# EAGLE board head_band (EAGLE 8.6.0)
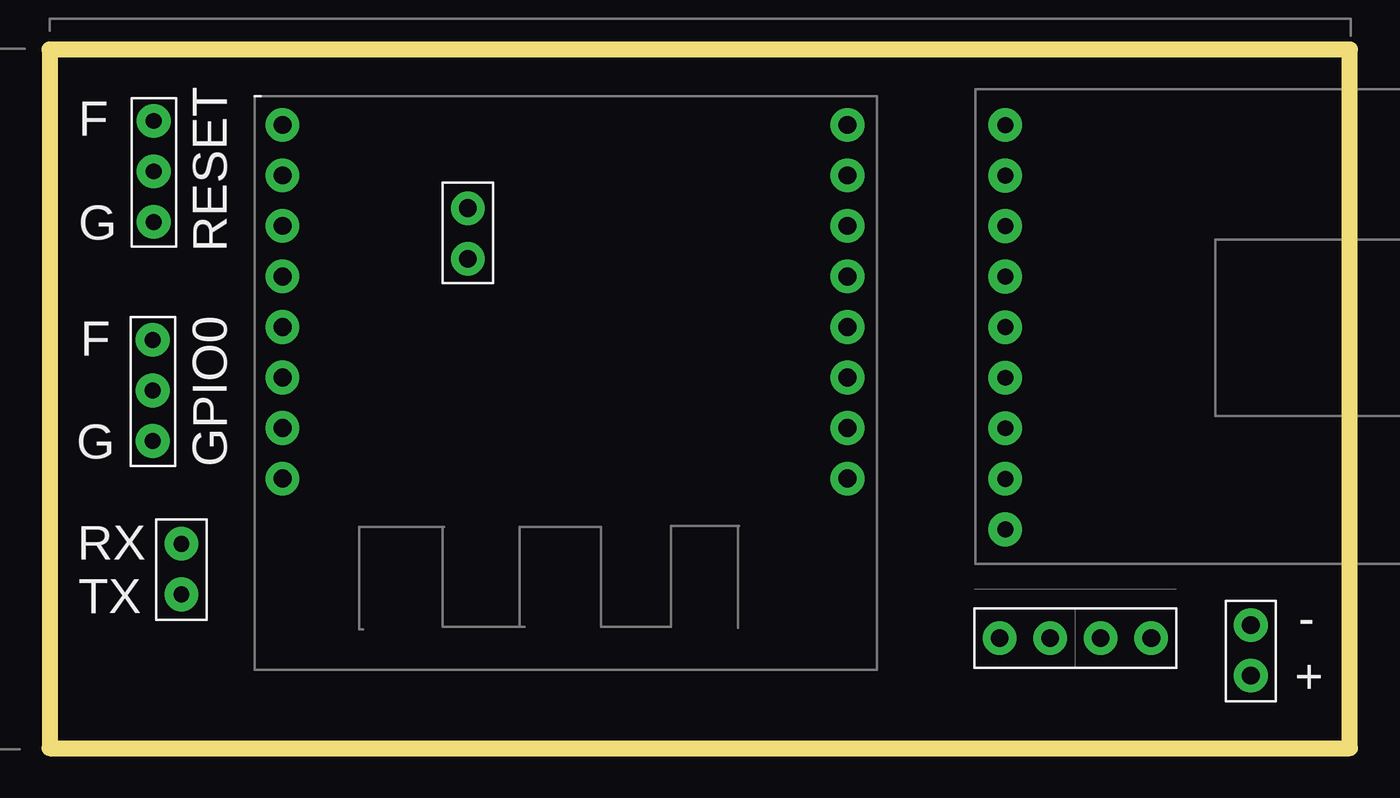
[diagram p0: board, top side]
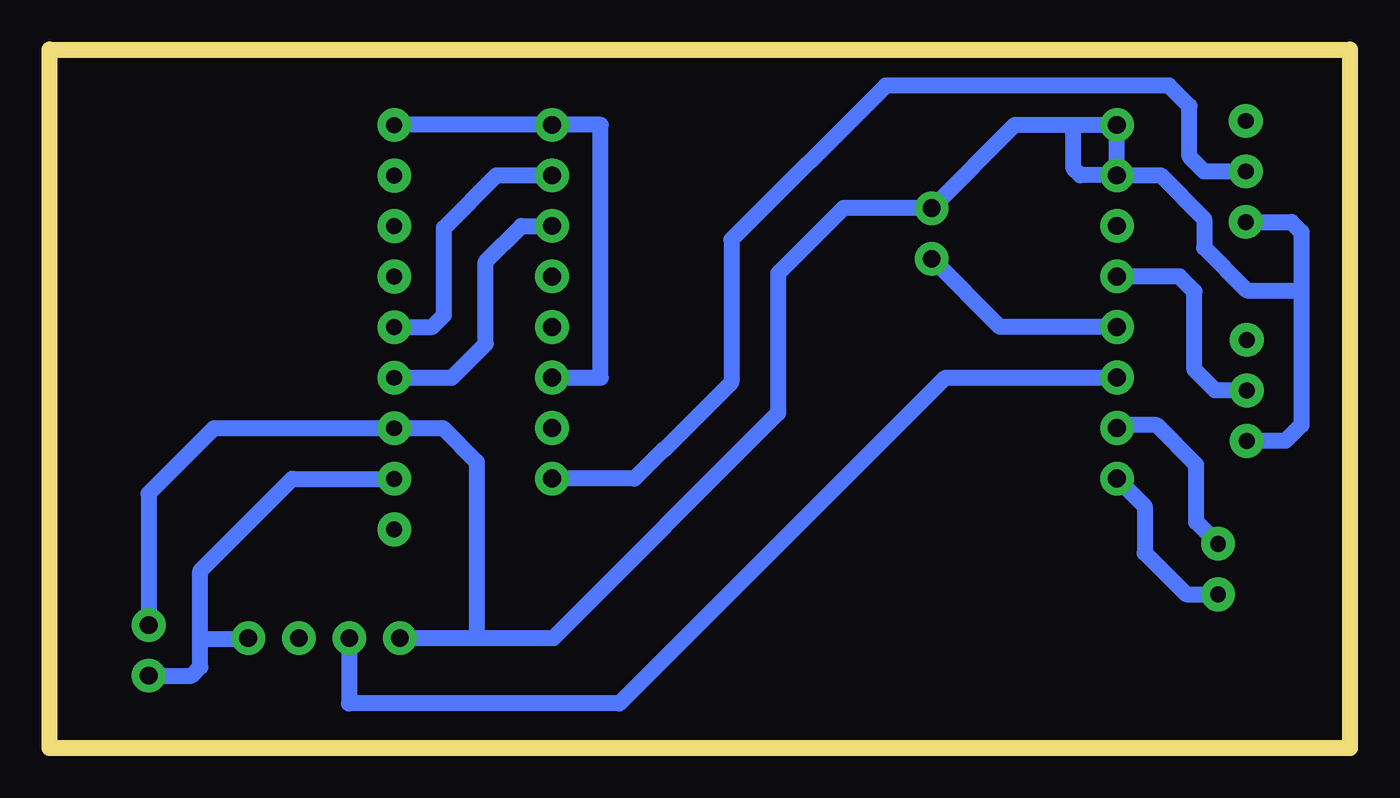
[diagram p1: board, bottom side, seen from below]

Size 65.6 x 35.25 mm. Coordinates in mm from the lower left corner, seen from the top.
Outline: 0,35.25 0,0 65.6,0 65.6,35.25 0,35.25
Copper layers (1*16): Top 0.035mm / dielectric 1.5mm / Bottom 0.035mm
Design rules "default": minimum track width 6mil, minimum drill 0.35mm, track to track 6mil, track to pad 6mil, pad to pad 6mil, via to via 6mil, smd to smd 6mil, copper to edge 40mil, drill to drill 6mil, minimum pad ring 10mil, minimum via ring 8mil, stop-mask expansion 4mil, vias tented up to drill 0mil, thermal gap 10mil

## Footprints (pad centres in the part's own frame; a part is rotated, then mirrored left to right if it is on the bottom)
ESP_WIFI_ME = drill 0.9 pad 1.7: P$1 -14.25,-11.35; P$2 -14.25,-8.8; P$3 -14.25,-6.25; P$4 -14.25,-3.7; P$5 -14.25,-1.15; P$6 -14.25,1.4; P$7 -14.25,3.95; P$8 -14.25,6.5; P$9 14.25,-11.35; P$10 14.25,-8.8; P$11 14.25,-6.25; P$12 14.25,-3.7; P$13 14.25,-1.15; P$14 14.25,1.4; P$15 14.25,3.95; P$16 14.25,6.5
GPS = drill 0.8 pad 1.7: P$1 -10.21,15.54; P$2 -7.66,15.54; P$3 -5.11,15.54; P$4 -2.56,15.54; P$5 -0.01,15.54; P$6 2.54,15.54; P$7 5.09,15.54; P$8 7.64,15.54; P$9 10.19,15.54
PIN_HEADER_2X1_GP = drill 0.9 pad 1.7: P$1 -1.31,0; P$2 1.24,0
PIN_HEADER_4X1_GP = drill 0.9 pad 1.7: P$1 -3.825,0; P$2 -1.275,0; P$3 1.275,0; P$4 3.825,0
PIN_HEADER_2X1_GP' = drill 0.8 pad 1.7: P$1 -1.31,0; P$2 1.24,0
PIN_HEADER_3X1_GP = drill 0.8 pad 1.7: P$1 0,0; P$2 2.55,0; P$3 -2.55,0

## Placement (x,y rotation side)
E$1  [ESP_WIFI_ME]  26,20.1 180 top
E$2  [GPS]  63.75,21.25 90 top
E$3  [PIN_HEADER_2X1_GP]  21.1,26 90 top
E$4  [PIN_HEADER_2X1_GP]  60.6,4.9 270 top
E$5  [PIN_HEADER_4X1_GP]  51.75,5.55 0 top
E$6  [PIN_HEADER_2X1_GP']  6.65,9 270 top
E$7  [PIN_HEADER_3X1_GP]  5.2,18.05 90 top
E$8  [PIN_HEADER_3X1_GP]  5.25,29.1 90 top

## Library data of the parts
E$1 = wifi
E$2 = GPS
E$3-E$5 = Pin_header
E$6-E$8 = custom components

## Nets
S$1: E$1.P$14
S$2: E$1.P$9 E$1.P$10 E$7.P$3 E$8.P$3
S$3: E$1.P$1 E$1.P$6
S$4: E$2.P$3 E$4.P$1
S$7: E$1.P$13
S$8: E$1.P$2
S$9: E$1.P$3
S$10: E$1.P$12 E$7.P$1
S$11: E$1.P$8 E$8.P$1
S$12: E$1.P$15 E$6.P$1
S$13: E$1.P$16 E$6.P$2
S$14: E$2.P$2 E$4.P$2 E$5.P$4

## Tracks (layer width: path | path; a pad name or v marks a point on that pad's centre or on a via)
S$1
  Bottom 0.8: E$1.P$14 20.4,18.7 36.85,2.25 50.5,2.25 50.5,5.55
S$2
  Bottom 0.8: 48.2,16.15 45.75,16.15 44.05,14.45 44.05,5.55 | 13.95,31.45 16.9,31.45 21.1,27.25 25.55,27.25 28.85,23.95 28.85,16.9 40.2,5.55 44.05,5.55 | 13.95,31.45 E$1.P$9 E$1.P$10 | 44.05,5.55 47.9,5.55 | E$8.P$3 2.95,26.55 2.45,26.05 2.45,23.1 | 2.45,23.1 2.45,16.3 3.25,15.5 E$7.P$3 | E$1.P$10 13.6,28.9 13.95,29.25 13.95,31.45 | E$1.P$10 9.55,28.9 7.35,26.7 7.35,25.25 5.2,23.1 2.45,23.1
S$3
  Bottom 0.8: E$1.P$6 37.8,18.7 37.8,31.45 E$1.P$1 48.2,31.45
S$4
  Bottom 0.8: E$2.P$3 57.31,16.14 60.6,12.85 E$4.P$1
S$7
  Bottom 0.8: E$1.P$13 17.65,21.25 21.1,24.7
S$8
  Bottom 0.8: 48.2,21.25 46.3,21.25 45.7,21.85 45.7,26.25 43.05,28.9 E$1.P$2
S$9
  Bottom 0.8: 48.2,18.7 45.3,18.7 43.6,20.4 43.6,24.55 41.8,26.35 E$1.P$3
S$10
  Bottom 0.8: E$7.P$1 6.8,18.05 7.85,19.1 7.85,23.05 8.6,23.8 E$1.P$12
S$11
  Bottom 0.8: E$8.P$1 7.35,29.1 8.1,29.85 8.1,32.4 9.13,33.43 23.42,33.43 31.2,25.65 31.2,18.45 34.6,15.05 34.65,15.05 36.1,13.6 E$1.P$8
S$12
  Bottom 0.8: E$6.P$1 7.75,11.41 7.75,14.3 9.75,16.3 11.6,16.3 E$1.P$15
S$13
  Bottom 0.8: E$1.P$16 10.35,12.2 10.35,9.85 8.26,7.76 E$6.P$2
S$14
  Bottom 0.8: E$4.P$2 58.44,3.66 58,4.1 58,5.5 | 58,5.5 58,8.95 53.36,13.59 E$2.P$2 | E$5.P$4 55.62,5.5 58,5.5

## Text on the board
tPlace: F | G | RESET | F | G | GPIO0 | RX | TX | - | +